# Altium PCB RightBar3_PcbDoc.PcbDoc
Units mil, origin at the board's own origin, x right, y up, seen from the top; angles counter-clockwise.
Board outline 10240 x 1400 mil, 2 copper layers (Top Layer, Bottom Layer); 8 components, 8 nets, 56 pads, 12 vias.
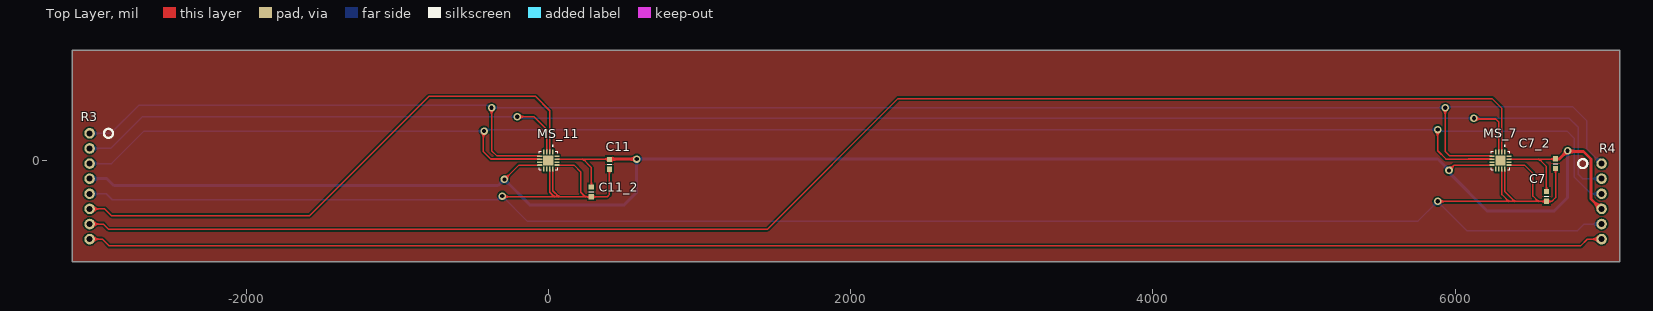
[diagram p0: Top Layer view]
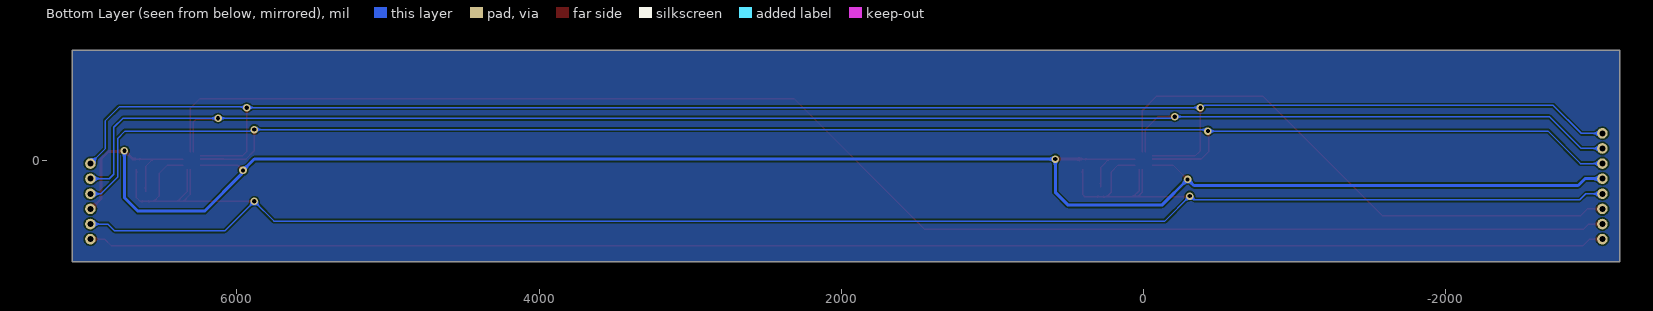
[diagram p1: Bottom Layer view, seen from below]
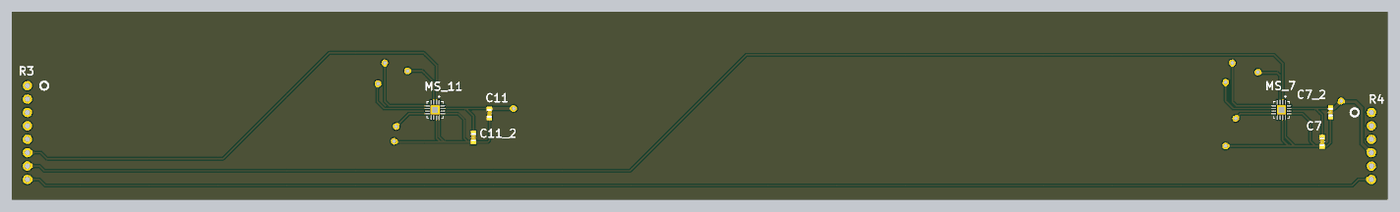
[diagram p2: 3D render of the assembled board from above, using the file's embedded part models]

## Layer stack, top to bottom
Top Solder: solder mask 0.4, Solder Resist, Dk 3.5
Top Layer: signal copper 1.4
Dielectric 1: dielectric 12.6, FR-4, Dk 4.8
Bottom Layer: signal copper 1.4
Bottom Solder: solder mask 0.4, Solder Resist, Dk 3.5

## Board outline
-3150,-670 -3150,730 7090,730 7090,-670

## Design rules (kind name [scope] priority, off if disabled: settings)
Clearance [All] p1: gap=10 ignorepadtopadclearanceinfootprint=FALSE except(0: Arc-Hole Track-Hole SMDPad-Hole THPad-Hole Via-Hole Fill-Hole Poly-Hole Region-Hole Text-Hole)
PolygonConnect [All] p1: connectstyle=Relief reliefconductorwidth=10 reliefentries=4 polygonreliefangle="90 Angle" airgapwidth=10
RoutingVias [All] p1: holewidth=28 width=50 viastyle="Through Hole" minholewidth=28 minwidth=50 maxholewidth=28 maxwidth=50
SolderMaskExpansion [All] p1: expansion=4 istentingtop=FALSE
Width [All] p1: maxlimit=10 minlimit=10 preferedwidth=10
30 further rules are at their usual default settings.

## Classes and differential pairs
component class Left_2_SchDoc: C7 C7_2 C11 C11_2 MS_7 MS_11 R3

## Components (designator, comment, footprint, x,y, rotation, side; value= is the part's Value field where it differs from the comment)
C7 "0.1uF" CAP_0603 6605,-237.5 r90 top
C7_2 "0.1uF" CAP_0603 6665,-20 r270 top
C11 "0.1uF" CAP_0603 405,-25 r90 top
C11_2 "0.1uF" CAP_0603 285,-207.5 r270 top
MS_7 "MLX90393SLW ABA 011 RE" MLX90393 6300,0 r270 top
MS_11 "MLX90393SLW ABA 011 RE" MLX90393 0,0 r270 top
R3 "PIN_right" PIN_RIGHT_3 -3035,-320 r0 top (schematic designator CON_R_3)
R4 "PIN_right" PIN_RIGHT_4 6970,-520 r0 top (schematic designator CON_R_4)

## Footprints (in the part's own frame and the unit in brackets; to place one, negate y for a bottom-side part, rotate by r counter-clockwise, add the part's x,y. Pads: shape width x height; smd on the part's side, far side on the other; paste and mask are expansions set on the pad)
CAP_0603 [mil]
  rect 35x35 smd: 1(-32.5,0) 2(32.5,0)
  silkscreen extent 0,-16 0,14, body extent -53,-18 49,21, height 35
MLX90393 [mm]
  rrect25% 0.86x0.26 smd: 1(-1.435,0.75) 2(-1.435,0.25) 3(-1.435,-0.25) 4(-1.435,-0.75) 9(1.435,-0.75) 10(1.435,-0.25) 11(1.435,0.25) 12(1.435,0.75)
  rrect25% 0.26x0.86 smd: 5(-0.75,-1.435) 6(-0.25,-1.435) 7(0.25,-1.435) 8(0.75,-1.435) 13(0.75,1.435) 14(0.25,1.435) 15(-0.25,1.435) 16(-0.75,1.435)
  rect 1.71x1.71 smd paste-2: 17(0,0)
  silkscreen extent -2.59,-1.55 1.55,1.55
PIN_RIGHT_3 [mil]
  round 70 hole 40: 1(0,500) 2(0,400) 3(0,300) 4(0,200) 5(0,100) 6(0,0) 7(0,-100) 8(0,-200)
  silkscreen extent 95,470 155,530
PIN_RIGHT_4 [mil]
  round 70 hole 40: 1(0,500) 2(0,400) 3(0,300) 4(0,200) 5(0,100) 6(0,0)
  silkscreen extent -155,470 -95,530

## Part data
C7 C7_2 C11 C11_2: library part CAP, "Capacitance"
MS_7 MS_11: "MLX90393 Sensor"
R3: library part PIN_right_3
R4: library part PIN_right_4

## Via types
v1: diameter 50, hole 28, Top Layer to Bottom Layer, 12 vias

## Nets (pads, with @x,y where several pads share a name; then routed paths per layer and width w, separated by ;. In a path a pad name is that pad's centre, name@x,y a point inside that pad or via, vN(x,y) a via of type N, cw(c..) or ccw(c..) an arc to the next point about the centre after c; other vN are vias at no path point)
7: MS_7.2 R3.7 | length 10033.2
  Top Layer w10: R3.7 -2945,-420 -2910,-455 1450,-455 2315,410 6245,410 6310,345 MS_7.2@6310,56.5
11: MS_11.2 R3.6 | length 3703.7
  Top Layer w10: R3.6 -2935,-320 -2890,-365 -1580,-365 -790,425 -85,425 10,330 MS_11.2@10,56.5
15: R3.8 R4.6 | length 10042.3
  Top Layer w10: R3.8 -2950,-520 -2905,-565 6830,-565 6875,-520 R4.6
GND: C7.1 C7_2.2 C11.1 C11_2.2 MS_7.11 MS_7.12 MS_7.13 MS_11.11 MS_11.12 MS_11.13 R3.5 R4.5 | length 13722
  Top Layer w10: v1(-305,-235) -300,-240 40,-240 ; MS_11.11 9.84,-209.84 40,-240 ; MS_11.12 29.53,-199.53 70,-240 ; MS_11.13 169.53,-29.53 215,-75 215,-210 245,-240 ; C11.1 405,-225 390,-240 C11_2.2 245,-240 ; v1(5885,-270) 6355,-270 ; MS_7.11 6309.84,-224.84 6355,-270 ; MS_7.12 6329.53,-204.53 6395,-270 ; MS_7.13 6459.53,-29.53 6515,-85 6515,-235 6550,-270 ; C7_2.2@6665,-57.5 6665,-245 6640,-270 C7.1 6550,-270 ; 40,-240 70,-240 ; 70,-240 245,-240 ; 6355,-270 6395,-270 ; 6395,-270 6550,-270
  Bottom Layer w10: R3.5 -2925,-220 -2885,-260 -335.86,-260 -310.86,-235 v1(-305,-235) -140,-400 5755,-400 v1(5885,-270) 6080,-465 6810,-465 6855,-420 R4.5
MISO: MS_7.6 MS_11.6 R3.3 R4.3 | length 11476.2
  Top Layer w10: v1(-425,195) -430,190 -430,60 -380.28,10.28 MS_11.6@-56.5,10.28 ; v1(5885,205) 5885,65 5940,10 6086.17,10 6086.45,10.28 MS_7.6@6243.5,10.28
  Bottom Layer w10: R3.3 -2890,-20 -2675,195 v1(-425,195) -415,205 v1(5885,205) 5892.65,197.35 5908.51,197.35 5910.86,195 6740,195 6790,145 6790,-110 6900,-220 R4.3
MOSI: MS_7.5 MS_11.5 R3.1 R4.1 | length 11582.3
  Top Layer w10: v1(-375,350) -375,65 -340.28,30.28 MS_11.5@-56.5,30.28 ; v1(5935,350) 5935,60 5964.72,30.28 MS_7.5@6243.5,30.28
  Bottom Layer w10: R3.1 -2895,180 -2710,365 -400.82,365 -385.82,350 v1(-375,350) v1(5935,350) 5940,355 6780,355 6870,265 6870,80 R4.1
SCL: MS_7.3 MS_11.3 R3.2 R4.2 | length 11195.7
  Top Layer w10: v1(-205,290) -95,290 -10.28,205.28 MS_11.3@-10.28,56.5 ; v1(6125,280) 6130,275 6270,275 6289.72,255.28 MS_7.3@6289.72,56.5
  Bottom Layer w10: R3.2 -2895,80 -2685,290 v1(-205,290) -197.35,282.35 -181.49,282.35 -179.14,280 v1(6125,280) 6755,280 6815,220 6815,-90 6845,-120 R4.2
VCC: C7.2 C7_2.1 C11.2 C11_2.1 MS_7.8 MS_7.15 MS_11.8 MS_11.15 R3.4 R4.4 | length 13128.5
  Top Layer w10: v1(-290,-125) -194.53,-29.53 MS_11.8 ; MS_11.15 229.58,9.84 ; C11_2.1 285,-45.58 229.58,9.84 ; C11.2@407.5,10 C11.2 402.66,9.84 229.58,9.84 ; v1(5960,-65) 5995.47,-29.53 MS_7.8 ; MS_7.15 6555.16,9.84 ; C7.2 6605,-40 6555.16,9.84 ; C7_2.1@6662.66,9.84 6555.16,9.84
  Top Layer w20: C11.2@407.5,10 v1(585,10) ; C7_2.1@6670,10 6690,10 v1(6745,65) 6750,60 6850,60 6900,10 6900,-255 6965,-320 R4.4
  Bottom Layer w10: v1(5960,-65) 5960,-75.82 5970.78,-86.61 5970.78,-90.78
  Bottom Layer w20: R3.4 -2920,-120 -2875,-165 -331.72,-165 -291.72,-125 v1(-290,-125) -120,-295 500,-295 585,-210 v1(585,10) 5885,10 v1(5960,-65) ; 5970.78,-90.78 6215,-335 6655,-335 6745,-245 v1(6745,65)
pads on no net: MS_7.1 MS_7.4 MS_7.7 MS_7.9 MS_7.10 MS_7.14 MS_7.16 MS_7.17 MS_11.1 MS_11.4 MS_11.7 MS_11.9 MS_11.10 MS_11.14 MS_11.16 MS_11.17

## Polygon pours and split planes (outlines as drawn)
no net on Bottom Layer "NONET_L02_P015" (solid, pour order 15): -3150,730 -3150,-670 7090,-670 7090,730
no net on Bottom Layer "NONET_L02_P002" (solid, pour order 2): -3174.26,647.54
no net on Top Layer "NONET_L01_P014" (solid, pour order 14): -3150,730 -3150,-670 7090,-670 7090,730

## Silkscreen, mask and mechanical layers (free items; w line width, h text height)
Mechanical 1:
  the board outline again, w10